# Altium PCB FRONT-UNIT-7_1.PcbDoc (part 1 of 3)
Units mm, origin at the board's own origin, x right, y up, seen from the top; angles counter-clockwise.
Board outline 280 x 128 mm, 2 copper layers (Top Layer, Top, Bottom Layer, Bottom), stack 1.671 mm thick; 140 components, 117 nets, 608 pads, 1302 vias.
Unrouted connection lines stored in the file: 26.
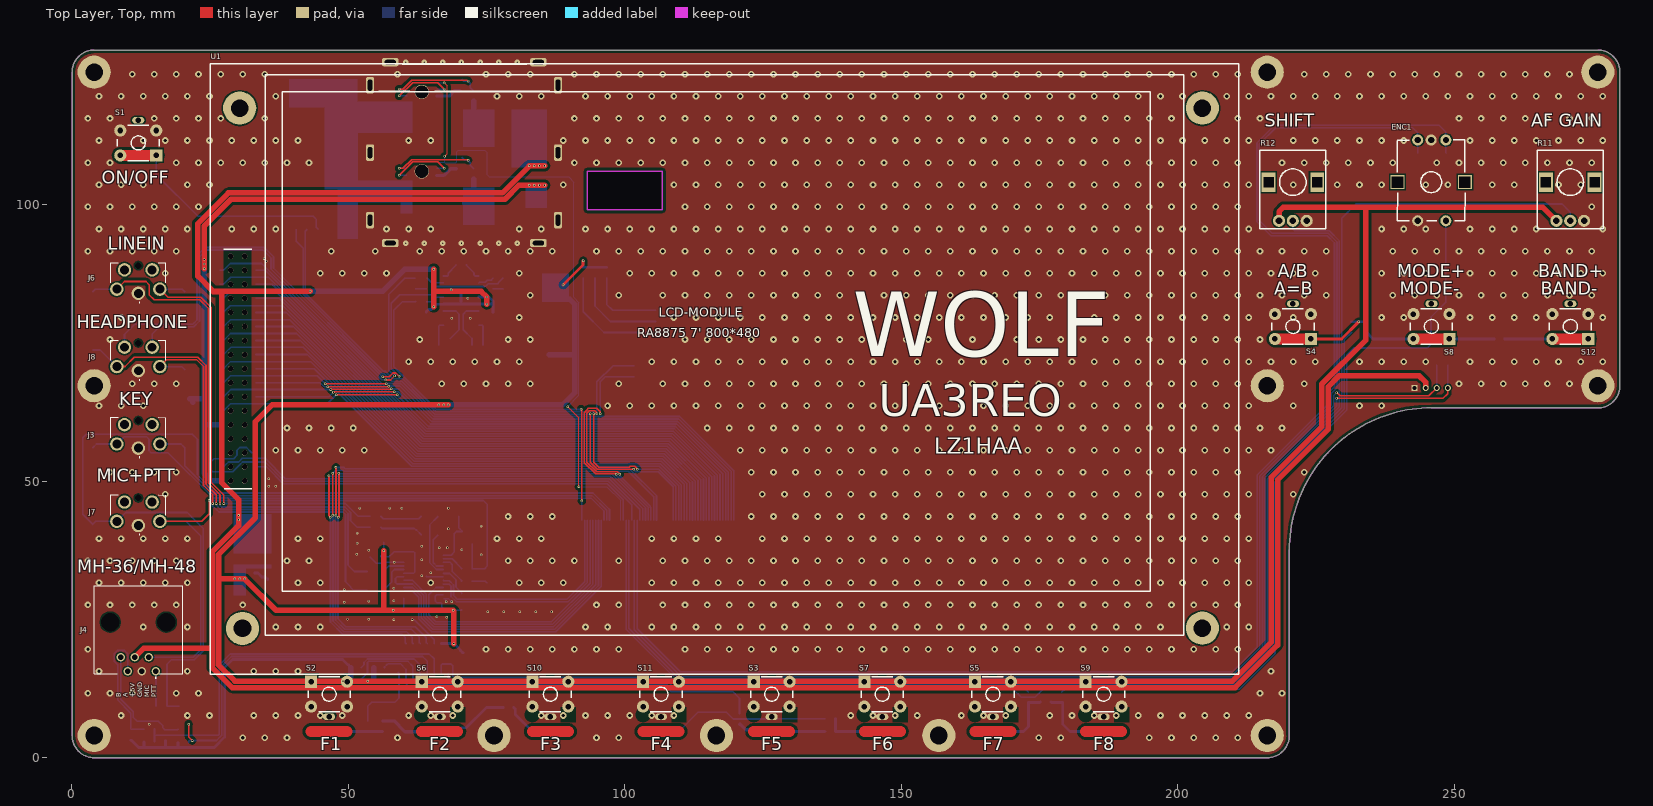
[diagram p0: Top Layer, Top view]
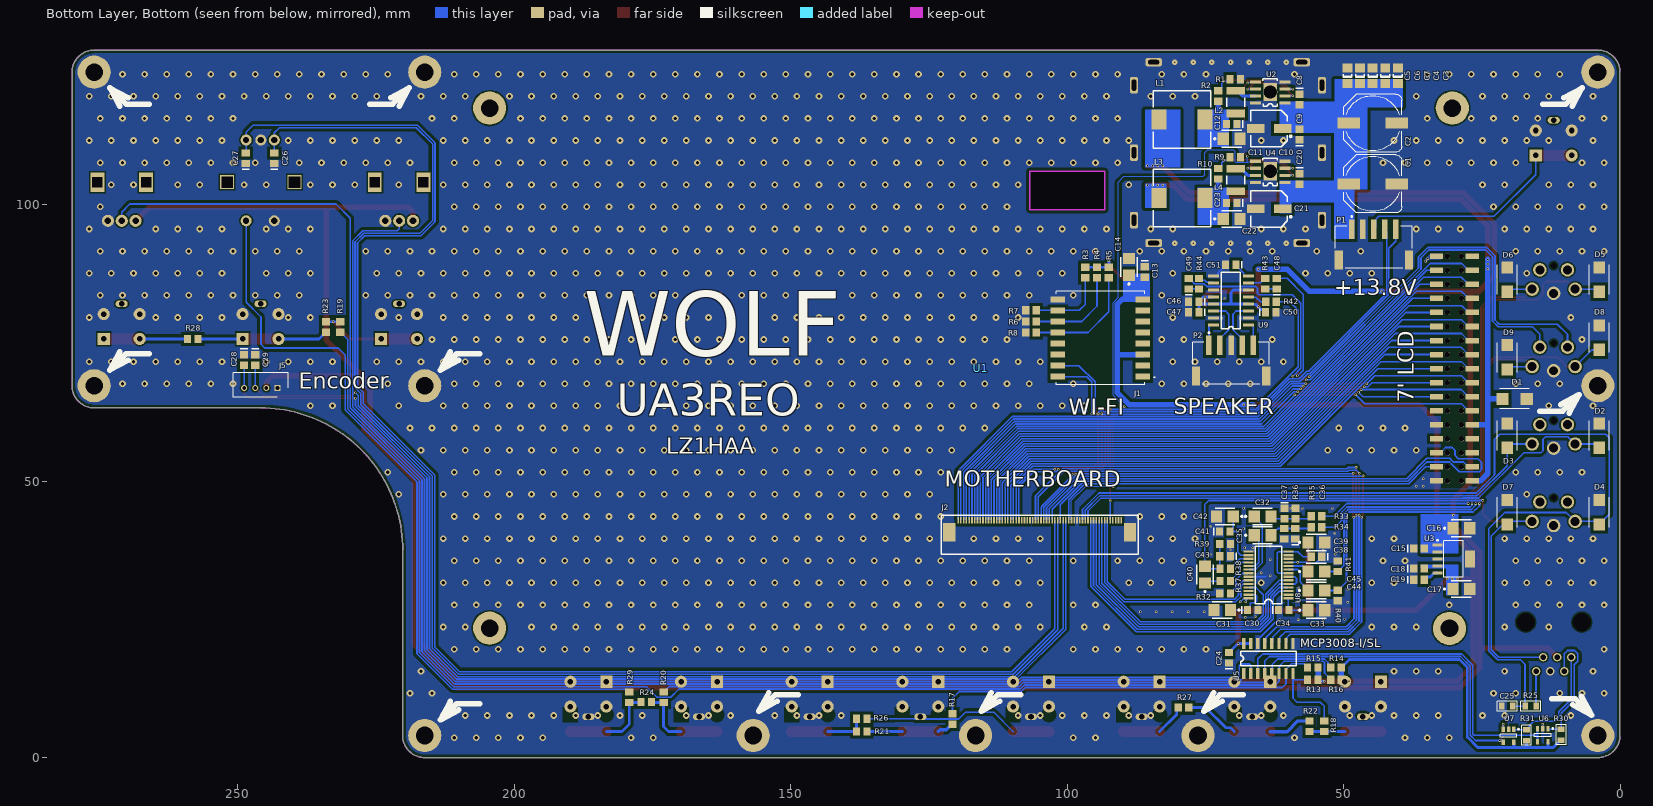
[diagram p1: Bottom Layer, Bottom view, seen from below]
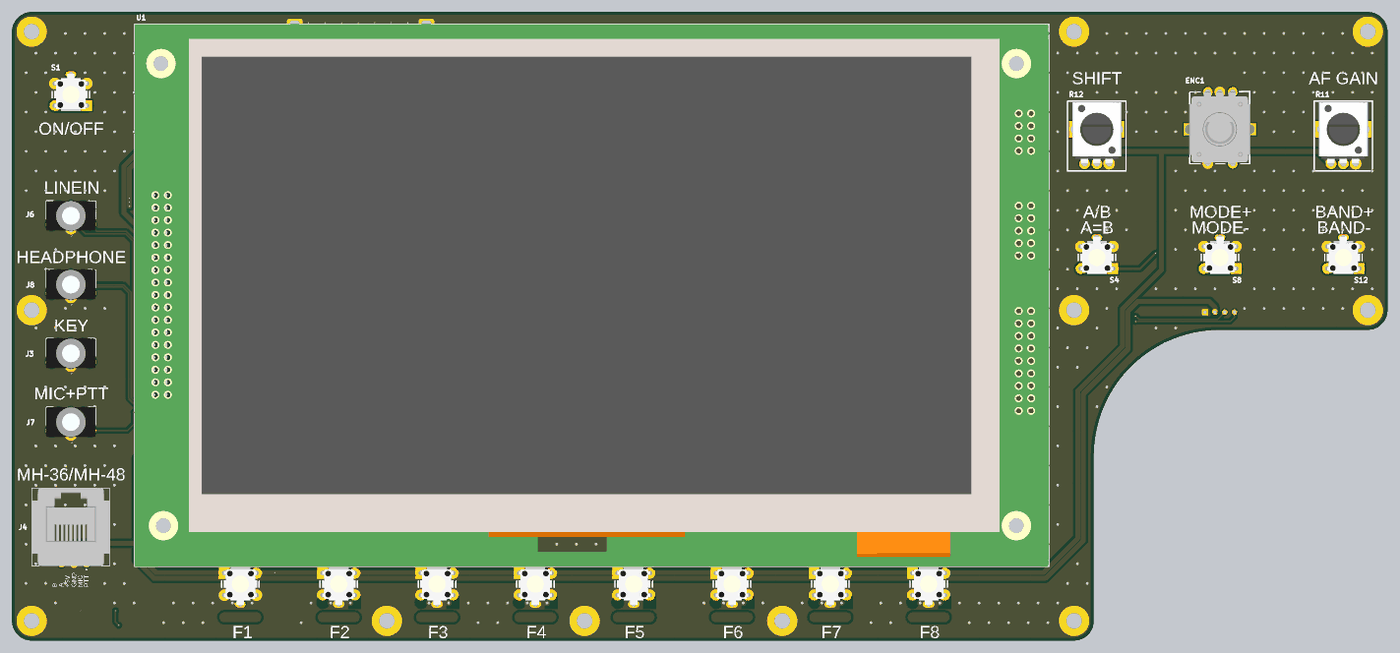
[diagram p4: 3D render of the assembled board from above, using the file's embedded part models]

## Layer stack, top to bottom
Top Solder, Top Mask: solder mask 0.0102, Solder Resist, Dk 3.5
Top Layer, Top: signal copper 0.0356
Dielectric 1: dielectric 1.6, FR-4, Dk 4.8
Bottom Layer, Bottom: signal copper 0.0356
Bottom Solder, Bot Mask: solder mask 0.0102, Solder Resist, Dk 3.5

## Board outline
0.006,4.013 ccw(c4.013,4.013) 4.013,0.006 216.193,0.006 ccw(c216.193,4.013) 220.2,4.013 220.2,37.575 cw(c245.9,37.575) 245.9,63.275 275.996,63.275 275.996,63.278 ccw(c275.996,67.285) 280.003,67.285 280.003,124.003 ccw(c275.996,124.003) 275.996,128.01 4.013,128.01 ccw(c4.013,124.003) 0.006,124.003
cut-out: 93.21,106.05 106.725,106.05 106.725,99.125 93.21,99.125

## Design rules (kind name [scope] priority, off if disabled: settings)
BoardOutlineClearance [All] p1: gap=0.3 ignorepadtopadclearanceinfootprint=FALSE
Clearance Clearance_NPTH [All vs InPadClass('NPTH')] p1: gap=0.4 ignorepadtopadclearanceinfootprint=FALSE except(0: Arc-Hole Track-Hole SMDPad-Hole THPad-Hole Via-Hole Fill-Hole Poly-Hole Region-Hole Text-Hole)
Clearance Clearance_MultiLayerPad [OnLayer('Multi-Layer') and IsPad] p2: gap=0.25 ignorepadtopadclearanceinfootprint=FALSE except(0: Arc-Hole Track-Hole SMDPad-Hole THPad-Hole Via-Hole Fill-Hole Poly-Hole Region-Hole Text-Hole)
Clearance Clearance_Polygon [InPolygon] p3: gap=0.5 ignorepadtopadclearanceinfootprint=FALSE
Clearance [All] p4: gap=0.15 ignorepadtopadclearanceinfootprint=FALSE except(0: Arc-Hole Track-Hole SMDPad-Hole THPad-Hole Via-Hole Fill-Hole Poly-Hole Region-Hole Text-Hole)
ComponentClearance [All] p1: gap=0 collisioncheckmode=3 verticalgap=0 showdistances=FALSE
Height [All] p1: minheight=0 maxheight=60 prefheight=12.7
HoleSize [All] p1: absolutevalues=TRUE maxlimit=5 minlimit=0.025 maxpercent=80.000 minpercent=20.000
HoleToHoleClearance [All] p1: gap=0.2 allowstackedmicrovias=TRUE
MinimumSolderMaskSliver [All] p1: minsoldermaskwidth=0.04
PlaneClearance [All] p1: clearance=0.5
PlaneConnect [All] p1: planeconnectstyle=Relief reliefexpansion=0.5 reliefentries=4 reliefconductorwidth=0.3 reliefairgap=0.2
PolygonConnect [All] p1: connectstyle=Direct reliefconductorwidth=0.6 reliefentries=4 polygonreliefangle="90 Angle" airgapwidth=0.3
RoutingVias [All] p1: holewidth=0.3 width=0.7 viastyle="Through Hole" minholewidth=0.25 minwidth=0.45 maxholewidth=3 maxwidth=5
SilkToSilkClearance [All] p1: silktosilkclearance=0
SilkToSolderMaskClearance [IsPad] p1: minsilkscreentomaskgap=0.05 clearancetoexposedcopper=TRUE
SolderMaskExpansion [All] p1: expansion=0.075 istentingtop=FALSE
Width [All] p1: maxlimit=10 minlimit=0.15 preferedwidth=0.3
21 further rules are at their usual default settings.

## Classes and differential pairs
net class PowerPads: 5V +3V3 +5 +13.8 GND NetL2_1
component class "AUDIO CODEC": C30 C31 C32 C33 C34 C35 C36 C37 C38 C39 C40 C41 C42 C43 C44 C45 C46 C47 C48 C49 C50 C51 D5 D6 D7 D8 D9 J6 J7 J8 MIС_IN1 P2 R32 R33 R34 R35 R36 R37 R38 R39 R40 R41 R42 R43 R44 U8 U9
component class FRONT-UNIT-7: C1 C2 C3 C4 C5 C6 C7 C8 C9 C10 C11 C12 C13 C14 C15 C16 C17 C18 C19 C20 C21 C22 C23 C24 C25 C26 C27 C28 C29 D1 D2 D3 D4 ENC1 J1 J2 J3 J5 L1 L2 L3 L4 P1 R1 R2 R3 R4 R5 R6 R7 R8 R9 R10 R11 R12 R13 R14 R15 R16 R17 R18 R19 R20 R21 R22 R23 R24 R25 R26 R27 R28 R29 R30 R31 S1 S2 S3 S4 S5 S6 S7 S8 S9 S10 S11 S12 U1 U2 U3 U4 U5 U6 U7

## Components (designator, comment, footprint, x,y, rotation, side; value= is the part's Value field where it differs from the comment)
C1 "470uF 25V" SMD-G-10X10.2 44.729,103.81 r0 bottom value=470µF
C2 "470uF 25V" SMD-G-10X10.2 44.729,114.783 r0 bottom value=470µF
C3 "1uF" CAP_1206 40.183,123.368 r90 bottom
C4 "100n" CAP_1206 42.462,123.368 r90 bottom
C5 "1n" CAP_1206 49.301,123.368 r90 bottom
C6 "470p" CAP_1206 47.022,123.368 r90 bottom
C7 "120p" CAP_1206 44.742,123.368 r90 bottom
C8 "100n" CAP_0805 57.988,119.253 r270 bottom
C9 "100n" CAP_0805 57.988,112.522 r90 bottom
C10 "4.7uF 16V" CAPAE_6.6x6.6h5.4 63.373,113.843 r0 bottom
C11 "22uF 10V" CAPAE_4.3x4.3h5.4 70.663,111.963 r180 bottom
C12 "100n" CAP_0805 70.053,114.63 r0 bottom
C13 "100n" CAP_0805 85.979,88.062 r270 bottom
C14 "10uF 10V" CAPAE_4.3x4.3h5.4 88.798,88.367 r90 bottom
C15 "100n" CAP_0805 36.551,37.846 r180 bottom
C16 "10uF 10V" CAPAE_4.3x4.3h5.4 29.083,41.504 r180 bottom
C17 "10uF 10V" CAPAE_4.3x4.3h5.4 29.083,30.505 r180 bottom
C18 "100n" CAP_0805 36.551,34.214 r180 bottom
C19 "100n" CAP_0805 36.551,32.207 r180 bottom
C20 "100n" CAP_0805 57.988,104.877 r270 bottom
C21 "4.7uF 16V" CAPAE_6.6X6.6H5.4 63.373,99.289 r0 bottom
C22 "22uF 10V" CAPAE_4.3X4.3H5.4 70.663,97.464 r180 bottom
C23 "100n" CAP_0805 70.053,100.33 r0 bottom
C24 "100n" CAP_0805 70.739,17.856 r90 bottom
C25 "0.1" CH0805C 20.422,9.322 r180 bottom
C26 "100n" CAP_0805 243.408,108.229 r90 bottom
C27 "100n" CAP_0805 248.575,108.235 r90 bottom
C28 "10n" CAP_0805 248.895,72.136 r270 bottom
C29 "10n" CAP_0805 246.863,72.136 r270 bottom
C30 "100n" CAP_0805 66.633,26.734 r180 bottom
C31 "10uF 10V" CAPAE_4.3X4.3H5.4 71.558,26.709 r0 bottom
C32 "1uF 10V" CAPAE_4.3X4.3H5.4 65.058,43.659 r180 bottom
C33 "10uF 10V" CAPAE_4.3X4.3H5.4 55.308,26.684 r180 bottom
C34 "100n" CAP_0805 61.033,26.709 r180 bottom
C35 "1uF 10V" CAPAE_4.3X4.3H5.4 65.058,40.234 r180 bottom
C36 "220p" CAP_0805 58.733,40.309 r90 bottom
C37 "220p" CAP_0805 60.683,44.359 r270 bottom
C38 "100n" CAP_0805 54.708,36.334 r0 bottom
C39 "10uF 10V" CAPAE_4.3X4.3H5.4 55.308,38.959 r180 bottom
C40 "1uF 10V" CAPAE_4.3X4.3H5.4 75.083,32.734 r90 bottom
C41 "100n" CAP_0805 71.683,40.909 r180 bottom
C42 "10uF 10V" CAPAE_4.3X4.3H5.4 71.058,43.659 r0 bottom
C43 "220p" CAP_0805 71.233,36.429 r0 bottom
C44 "220uF 10V" CAPAE_4.3X4.3H5.4 55.308,30.234 r180 bottom
C45 "220uF 10V" CAPAE_4.3X4.3H5.4 55.308,33.684 r180 bottom
C46 "1uF" CAP_0805 76.911,82.499 r0 bottom
C47 "100n" CAP_0805 76.911,80.594 r0 bottom
C48 "1uF" CAP_0805 62.103,85.55 r90 bottom
C49 "1uF" CAP_0805 78.029,85.55 r90 bottom
C50 "1uF" CAP_0805 63.348,80.594 r180 bottom
C51 "1uF" CAP_0805 70.206,89.154 r0 bottom
D1 "SMAJ5.0A-TR" SMBJ36CATR 19.075,64.897 r180 bottom
D2 "SMAJ5.0A-TR" SMBJ36CATR 3.75,58.275 r90 bottom
D3 "SMAJ5.0A-TR" SMBJ36CATR 20.4,58.275 r90 bottom
D4 "SMAJ5.0A-TR" SMBJ36CATR 3.75,44.4 r90 bottom
D5 "SMAJ5.0A-TR" SMBJ36CATR 3.75,86.475 r90 bottom
D6 "SMAJ5.0A-TR" SMBJ36CATR 20.4,86.475 r90 bottom
D7 "SMAJ5.0A-TR" SMBJ36CATR 20.4,44.4 r90 bottom
D8 "SMAJ5.0A-TR" SMBJ36CATR 3.759,75.997 r90 bottom
D9 "SMAJ5.0A-TR" SMBJ36CATR 20.4,72.425 r90 bottom
ENC1 "PEC12" PEC12 245.86,104.11 r0 top locked
J1 "ESP8266_ESP-07" ESP8266ESP07 94.005,75.921 r0 bottom locked
J2 "AFC07-S60FCA-00" AFC07-S60FCA-00 104.975,41.875 r180 bottom locked
J3 "PJ-3583-B" PJ3583B 12,56 r180 top locked
J4 "42878-6216" 428786216 15.164,15.642 r0 top locked
J5 "B4B-PH-K-S_LF__SN_" SHDR4W50P0X200_1X4_990X450X600P 242.863,66.878 r180 bottom locked
J6 "PJ-3583-B" PJ3583B 12,84 r180 top locked
J7 "PJ-3583-B" PJ3583B 12,42 r180 top locked
J8 "PJ-3583-B" PJ3583B 12,70 r180 top locked
L1 "10uH" IND_FERRITE_CORE 79.248,115.443 r180 bottom
L2 "3.3uH" IND_1812 69.52,118.593 r270 bottom
L3 "10uH" IND_FERRITE_CORE 79.248,101.239 r180 bottom
L4 "3.3uH" IND_1812 69.52,104.496 r270 bottom
P1 "S5B-PH-SM4-TB(LF)(SN)" JST-S5B-PH-SM4-TB_V 44.526,92.913 r180 bottom
P2 "S5B-PH-SM4-TB(LF)(SN)" JST-S5B-PH-SM4-TB_V 70.358,71.907 r180 bottom locked
R1 "7.5k" RES_0805 69.571,122.707 r0 bottom
R2 "39k" RES_0805 72.669,119.71 r270 bottom
R3 "4.7k" RES_0805 96.749,87.782 r270 bottom
R4 "4.7k" RES_0805 94.602,87.782 r270 bottom
R5 "4.7k" RES_0805 92.456,87.782 r270 bottom
R6 "0R" RES_0805 106.528,80.924 r0 bottom
R7 "0R" RES_0805 106.528,78.918 r0 bottom
R8 "0R" RES_0805 106.528,76.911 r0 bottom
R9 "4.7k" RES_0805 69.571,108.61 r0 bottom
R10 "15k" RES_0805 72.669,105.613 r270 bottom
R11 "ptv09a-4225f-b102" PTV09 271.01,104.11 r0 top locked value="AF GAIN 1k"
R12 "ptv09a-4225f-b102" PTV09 220.835,104.11 r0 top locked value="SHIFT 1k"
R13 "4.7k" RES_0805 55.575,14.097 r180 bottom
R14 "4.7k" RES_0805 51.376,16.307 r180 bottom
R15 "4.7k" RES_0805 55.575,16.307 r180 bottom
R16 "4.7k" RES_0805 51.376,14.097 r180 bottom
R17 "1k" RES_0805 120.752,7.01 r90 bottom
R18 "1k" RES_0805 53.5,5.675 r90 bottom
R19 "1k" RES_0805 231.461,77.902 r270 bottom
R20 "1k" RES_0805 172.975,10.925 r90 bottom
R21 "2k" RES_0805 137.16,4.75 r180 bottom
R22 "2k" RES_0805 56.175,5.702 r270 bottom
R23 "2k" RES_0805 234.061,77.902 r90 bottom
R24 "2k" RES_0805 176.125,10.075 r180 bottom
R25 "100" CH0805R 16.18,9.322 r0 bottom
R26 "4.7k" RES_0805 137.16,7.061 r0 bottom
R27 "4.7k" RES_0805 78.969,9.068 r180 bottom
R28 "4.7k" RES_0805 258.191,75.743 r180 bottom
R29 "4.7k" RES_0805 179.225,10.925 r270 bottom
R30 "47k" CH0805R 10.649,4.157 r270 bottom
R31 "47k" CH0805C 16.916,4.064 r270 bottom
R32 "10k" RES_0805 71.433,29.709 r180 bottom
R33 "5.6k" RES_0805 54.883,43.659 r0 bottom
R34 "5.6k" RES_0805 54.883,41.709 r0 bottom
R35 "5.6k" RES_0805 60.708,40.509 r90 bottom
R36 "5.6k" RES_0805 58.708,44.184 r270 bottom
R37 "10k" RES_0805 71.408,31.949 r180 bottom
R38 "680" RES_0805 71.408,34.189 r180 bottom
R39 "47k" RES_0805 71.433,38.669 r0 bottom
R40 "47k" RES_0805 51.033,29.334 r90 bottom
R41 "47k" RES_0805 51.033,34.659 r270 bottom
R42 "1k" RES_0805 63.144,82.499 r180 bottom
R43 "30k" RES_0805 64.16,85.75 r270 bottom
R44 "30k" RES_0805 76.149,85.75 r270 bottom
S1 "PTS645SK50LFS" PTS645SK50LFS 11.989,111.201 r180 top locked value=PWR
S2 "PTS645SK50LFS" PTS645SK50LFS 46.5,11.5 r0 top locked
S3 "PTS645SK50LFS" PTS645SK50LFS 126.557,11.5 r0 top locked
S4 "PTS645SK50LFS" PTS645SK50LFS 220.85,78.002 r180 top locked
S5 "PTS645SK50LFS" PTS645SK50LFS 166.586,11.5 r0 top locked
S6 "PTS645SK50LFS" PTS645SK50LFS 66.514,11.5 r0 top locked
S7 "PTS645SK50LFS" PTS645SK50LFS 146.571,11.5 r0 top locked
S8 "PTS645SK50LFS" PTS645SK50LFS 245.9,78.002 r180 top locked
S9 "PTS645SK50LFS" PTS645SK50LFS 186.6,11.5 r0 top locked
S10 "PTS645SK50LFS" PTS645SK50LFS 86.529,11.5 r0 top locked
S11 "PTS645SK50LFS" PTS645SK50LFS 106.543,11.5 r0 top locked
S12 "PTS645SK50LFS" PTS645SK50LFS 271.025,78.002 r180 top locked
U1 "LCD-RA8875" LCD-RA8875 25,125.5 r0 top locked
U2 "ST1S10" ST1S10 63.271,120.32 r0 bottom
U3 "TPS79633DCQR" DCQ0006A_L 30.099,35.941 r180 bottom
U4 "ST1S10" ST1S10 63.271,105.964 r0 bottom
U5 "MCP3008-I/SL" MCP3008-I/SL 63.602,17.958 r90 bottom
U6 "MCP6001UT" SOT23-5 13.97,4.064 r270 bottom
U7 "MCP6001UT" SOT23-5 20.142,3.962 r270 bottom
U8 "WM8731" WM8731 63.583,33.059 r0 bottom
U9 "PAM8406" PAM8403 70.387,82.701 r0 bottom

## Footprints (in the part's own frame and the unit in brackets; to place one, negate y for a bottom-side part, rotate by r counter-clockwise, add the part's x,y. Pads: shape width x height; smd on the part's side, far side on the other; paste and mask are expansions set on the pad)
428786216 [mm]
  round 1.509 hole 0.97: 1(0,0) 2(-1.27,2.54) 3(-2.54,0) 4(-3.81,2.54) 5(-5.08,0) 6(-6.35,2.54)
  round 1.665 hole 3.33 unplated: 7(-8.255,8.89) 8(1.905,8.89)
  silkscreen extent -11.17,-1.3 4.82,15.44, body extent -11.18,-0.44 4.83,15.44, height 12.71
AFC07-S60FCA-00 [mm]
  rect 0.3x1.2 smd: 1(-14.75,1.088) 2(-14.25,1.088) 3(-13.75,1.088) 4(-13.25,1.088) 5(-12.75,1.088) 6(-12.25,1.088) 7(-11.75,1.088) 8(-11.25,1.088) 9(-10.75,1.088) 10(-10.25,1.088) 11(-9.75,1.088) 12(-9.25,1.088) 13(-8.75,1.088) 14(-8.25,1.088) 15(-7.75,1.088) 16(-7.25,1.088) 17(-6.75,1.088) 18(-6.25,1.088) 19(-5.75,1.088) 20(-5.25,1.088) 21(-4.75,1.088) 22(-4.25,1.088) 23(-3.75,1.088) 24(-3.25,1.088) 25(-2.75,1.088) 26(-2.25,1.088) 27(-1.75,1.088) 28(-1.25,1.088) 29(-0.75,1.088) 30(-0.25,1.088) 31(0.25,1.088) 32(0.75,1.088) 33(1.25,1.088) 34(1.75,1.088) 35(2.25,1.088) 36(2.75,1.088) 37(3.25,1.088) 38(3.75,1.088) 39(4.25,1.088) 40(4.75,1.088) 41(5.25,1.088) 42(5.75,1.088) 43(6.25,1.088) 44(6.75,1.088) 45(7.25,1.088) 46(7.75,1.088) 47(8.25,1.088) 48(8.75,1.088) 49(9.25,1.088) 50(9.75,1.088) 51(10.25,1.088) 52(10.75,1.088) 53(11.25,1.088) 54(11.75,1.088) 55(12.25,1.088) 56(12.75,1.088) 57(13.25,1.088) 58(13.75,1.088) 59(14.25,1.088) 60(14.75,1.088)
  rect 2.2x3.3 smd: 61(-16.35,-1.087) 62(16.35,-1.087)
  silkscreen extent -17.8,-5.05 17.8,1.95, body extent -17.14,-4.83 17.14,0.89, height 3
CAP_0805 [mm]
  rect 1.3x1.5 smd: 1(-0.75,0) 2(1.15,0)
  silkscreen extent -1.8,-0.65 -1.8,0.65
CAP_1206 [mm]
  rect 1.6x1.8 smd: 1(-1.4,0) 2(1.4,0)
  silkscreen extent -0.3,-0.8 0.3,0.8
CAPAE_4.3x4.3h5.4 [mm]
  rect 2x2.2 smd: 1(-1.1,0) 2(1.9,0)
  silkscreen extent -2.9,-1.5 2.2,1.5
CAPAE_4.3X4.3H5.4 [mm]
  rect 2x2.2 smd: 1(-1.1,0) 2(1.9,0)
  silkscreen extent -2.9,-1.5 2.2,1.5
CAPAE_6.6x6.6h5.4 [mm]
  rect 3.15x1.6 smd: 1(-2.362,0) 2(2.538,0)
  silkscreen extent -4.11,-3.3 3.39,3.3
CAPAE_6.6X6.6H5.4 [mm]
  rect 3.15x1.6 smd: 1(-2.362,0) 2(2.538,0)
  silkscreen extent -4.11,-3.3 3.39,3.3
CH0805C [mm] "Chip Capacitor, 2-Leads, Body 2,00x1,20mm, IPC Medium Density"
  rect 1x1.25 smd: 1(-1,0) 2(1,0)
  silkscreen extent -1.8,-0.9 1.8,0.9, body extent -1,-0.62 1,0.63, height 0.78
CH0805R [mm]
  rect 1x1.25 smd: 1(-1,0) 2(1,0)
  silkscreen extent -1.8,-0.9 1.8,0.9, body extent -1,-0.6 1,0.6, height 0.44
DCQ0006A_L [mm] "SOT223, 6-Leads, Body 6.55x3.55mm, Pitch 1.27mm, IPC High Density"
  rrect17% 1.8x0.6 smd: 1(-2.925,2.54) 2(-2.925,1.27) 3(-2.925,0) 4(-2.925,-1.27) 5(-2.925,-2.54)
  rrect6% 1.8x3.15 smd: 6(2.925,0)
  silkscreen extent -3.05,-3.3 1.75,3.51, body extent -3.48,-3.25 3.48,3.25, height 1.64
ESP8266ESP07 [mm]
  rect 2.6x1.1 smd: 1(-7.7,7) 2(-7.7,5) 3(-7.7,3) 4(-7.7,1) 5(-7.7,-1) 6(-7.7,-3) 7(-7.7,-5) 8(-7.7,-7) 9(7.7,-7) 10(7.7,-5) 11(7.7,-3) 12(7.7,-1) 13(7.7,1) 14(7.7,3) 15(7.7,5) 16(7.7,7)
  silkscreen extent -9.9,-8.5 8,8.5, body extent -8,-8 8,9, height 2.21
IND_1812 [mm]
  rect 1.4x3.4 smd: 1(-2.05,0) 2(2.05,0)
  silkscreen extent -0.8,-1.6 0.8,1.6
IND_FERRITE_CORE [mm]
  rect 2.7x3.6 smd: 1(-4.15,0) 2(4.15,0)
  silkscreen extent -5.2,-5.2 5.2,5.2
JST-S5B-PH-SM4-TB_V [mm] "SMD, 7-Leads, Body 13.9x7.6mm, Pitch 2mm"
  rect 1x3.5 smd: 1(-4,2.675) 2(-2,2.675) 3(0,2.675) 4(2,2.675) 5(4,2.675)
  rect 1.5x3.4 smd: MP1(-6.35,-2.875) MP2(6.35,-2.875)
  silkscreen extent -6.95,-4.38 6.95,5.1, body extent -6.95,-4.38 6.95,4.22, height 5.6
LCD-RA8875 [mm]
  round 6 hole 3.2: 0(5.33,-8) 0(5.84,-102.1) 0(179.46,-102.07) 0(179.46,-8)
  rect 2.4x1 smd far side: 1(1.713,-34.798) 2(8.213,-34.798) 3(1.713,-37.338) 4(8.213,-37.338) 5(1.713,-39.878) 6(8.213,-39.878) 7(1.713,-42.418) 8(8.213,-42.418) 9(1.713,-44.958) 10(8.213,-44.958) 11(1.713,-47.498) 12(8.213,-47.498) 13(1.713,-50.038) 14(8.213,-50.038) 15(1.713,-52.578) 16(8.213,-52.578) 17(1.713,-55.118) 18(8.213,-55.118) 19(1.713,-57.658) 20(8.213,-57.658) 21(1.713,-60.198) 22(8.213,-60.198) 23(1.713,-62.738) 24(8.213,-62.738) 25(1.713,-65.278) 26(8.213,-65.278) 27(1.713,-67.818) 28(8.213,-67.818) 29(1.713,-70.358) 30(8.213,-70.358) 31(1.713,-72.898) 32(8.213,-72.898) 33(1.713,-75.438) 34(8.213,-75.438)
  round 1 hole 1 unplated: ""(3.683,-75.438) ""(3.683,-72.898) ""(3.683,-70.358) ""(3.683,-67.818) ""(3.683,-65.278) ""(3.683,-62.738) ""(3.683,-60.198) ""(3.683,-57.658) ""(3.683,-55.118) ""(3.683,-52.578) ""(3.683,-50.038) ""(3.683,-47.498) ""(3.683,-44.958) ""(3.683,-42.418) ""(3.683,-39.878) ""(3.683,-37.338) ""(3.683,-34.798) ""(6.223,-75.438) ""(6.223,-72.898) ""(6.223,-70.358) ""(6.223,-67.818) ""(6.223,-65.278) ""(6.223,-62.738) ""(6.223,-60.198) ""(6.223,-57.658) ""(6.223,-55.118) ""(6.223,-52.578) ""(6.223,-50.038) ""(6.223,-47.498) ""(6.223,-44.958) ""(6.223,-42.418) ""(6.223,-39.878) ""(6.223,-37.338) ""(6.223,-34.798)
  Top Layer, Top pour cut-out: 2.45,-33.8 7.45,-33.8 7.45,-76.825 2.45,-76.825
  Bottom Layer, Bottom pour cut-out: 2.45,-33.8 7.45,-33.8 7.45,-76.825 2.45,-76.825
  silkscreen extent 0,-110.36 186.06,0, body extent 0,-110.36 186.06,0, height 11.6
MCP3008-I/SL [mm]
  rect 2x0.6 smd: 1(-2.7,4.445) 2(-2.7,3.175) 3(-2.7,1.905) 4(-2.7,0.635) 5(-2.7,-0.635) 6(-2.7,-1.905) 7(-2.7,-3.175) 8(-2.7,-4.445) 9(2.7,-4.445) 10(2.7,-3.175) 11(2.7,-1.905) 12(2.7,-0.635) 13(2.7,0.635) 14(2.7,1.905) 15(2.7,3.175) 16(2.7,4.445)
  silkscreen extent -1.3,-5 1.3,5
PAM8403 [mm]
  rect 2x0.6 smd: 1(-3.175,4.445) 2(-3.175,3.175) 3(-3.175,1.905) 4(-3.175,0.635) 5(-3.175,-0.635) 6(-3.175,-1.905) 7(-3.175,-3.175) 8(-3.175,-4.445) 9(3.175,-4.445) 10(3.175,-3.175) 11(3.175,-1.905) 12(3.175,-0.635) 13(3.175,0.635) 14(3.175,1.905) 15(3.175,3.175) 16(3.175,4.445)
  silkscreen extent -1.7,-5.15 1.7,5.15
PEC12 [mm]
  round 2 hole 1.1: 1(-2.44,-6.985) 2(2.64,-6.985) 3(2.64,7.62) 4(0,7.618) 5(-2.44,7.62)
  rect 2.5x2.5 hole 2 square: 6(-6.1,0) 7(6.1,0)
  silkscreen extent -6.12,-7 6.12,7.7, body extent -7,-7.15 7,7.6, height 20
PJ3583B [mm]
  round 2.43 hole 1.62: 2(0,0) 3(-3.9,-0.75) 4(-2.5,-4.25) 5(2.5,-4.25) 6(3.9,-0.75)
  round 0.6 hole 1.2 unplated: MH1(0,-5)
  silkscreen extent -5,-5.55 5,1.7, body extent -5,-5.54 5,0.56, height 15
PTS645SK50LFS [mm]
  rect 2.2x2.2 hole 1: 1(-3.25,2.25)
  round 2.2 hole 1: 2(3.25,2.25) 3(3.25,-2.25) 4(-3.25,-2.25)
  oval 2.2x1.2 hole 1: 5(0,-4.1)
  silkscreen extent -3.81,-3.17 3.81,3.18, body extent -3.85,-4.25 3.85,3, height 7.3
PTV09 [mm]
  round 2.2 hole 1.2: 1(-2.5,-7) 2(0,-7) 3(2.5,-7)
  rect 2.5x3.5 hole 1.8 square: 4(-4.4,0) 5(4.4,0)
  silkscreen extent -5.96,-8.46 5.94,5.74, body extent -5.66,-7.11 5.64,5.49, height 31.54
RES_0805 [mm]
  rect 1.3x1.5 smd: 1(-0.95,0) 2(0.95,0)
SHDR4W50P0X200_1X4_990X450X600P [mm]
  rect 1.1x1.1 hole 0.7: 1(0,0)
  round 1.1 hole 0.7: 2(-2,0) 3(-4,0) 4(-6,0)
  silkscreen extent -7.95,-1.7 1.95,2.8, body extent -7.95,-2.25 1.95,2.25, height 6
SMBJ36CATR [mm]
  rect 2.2x2.15 smd: 1(-2.2,0) 2(2.2,0)
  silkscreen extent -2.68,-1.81 2.68,1.81, body extent -3.09,-1.81 3.09,1.81, height 2.75
SMD-G-10X10.2 [mm] "10X7.7, 8.7, 10, 10.5, 12.5"
  rect 4.1x2 smd paste-0.05 mask+0.05: 1(4.35,0) 2(-4.35,0)
  silkscreen extent -5.25,-5.25 5.25,5.25, body extent -5.85,-5.15 5.85,5.15
SOT23-5 [mm] "SOT23, 5-Leads, Body 2,90x2,80mm, Pitch 0,95mm, IPC Medium Density"
  rect 1x0.6 smd: 1(-1.2,0.95) 2(-1.2,0) 3(-1.2,-0.95) 4(1.2,-0.95) 5(1.2,0.95)
  round 0.5 on Mech2: ""(-1.1,1.1)
  silkscreen extent -1.32,-1.5 0.25,1.92, body extent -1.5,-1.5 1.5,1.5, height 1.3
ST1S10 [mm]
  rect 2x0.6 smd: 1(-2.7,1.905) 2(-2.7,0.635) 3(-2.7,-0.635) 4(-2.7,-1.905) 5(2.7,-1.905) 6(2.7,-0.635) 7(2.7,0.635) 8(2.7,1.905)
  rect 2.41x3.3 smd: 9(0,-0.1)
  silkscreen extent -1.32,-2.5 1.32,2.5
WM8731 [mm]
  rect 1.8x0.4 smd: 1(-3.6,4.225) 2(-3.6,3.575) 3(-3.6,2.925) 4(-3.6,2.275) 5(-3.6,1.625) 6(-3.6,0.975) 7(-3.6,0.325) 8(-3.6,-0.325) 9(-3.6,-0.975) 10(-3.6,-1.625) 11(-3.6,-2.275) 12(-3.6,-2.925) 13(-3.6,-3.575) 14(-3.6,-4.225) 15(3.6,-4.225) 16(3.6,-3.575) 17(3.6,-2.925) 18(3.6,-2.275) 19(3.6,-1.625) 20(3.6,-0.975) 21(3.6,-0.325) 22(3.6,0.325) 23(3.6,0.975) 24(3.6,1.625) 25(3.6,2.275) 26(3.6,2.925) 27(3.6,3.575) 28(3.6,4.225)
  silkscreen extent -2.4,-5.2 2.4,5.2

## Part data
C1 C2: library part "SMD-G 470uF 25V", "CAP ALUM 470UF 20% 25V SMD", Lifetime @ Temp=2000Hrs@105℃, Manufacturer=KEMET, Manufacturer PartNumber=EDH477M025A9PAA, Package / Case="G, 0.394\" Dia (10.00mm)", Temp.Characteristic="–55 °C to +105 °C", Tolerance="±20 %", Voltage=25V, Assembly type="Manual Part", ComponentLink2URL=http://www.mouser.com/ds/2/315/ABA0000C1181-947564.pdf, Dealer Digi-Key=https://www.digikey.com/product-detail/en/kemet/EDH477M025A9PAA/EDH477M025A9PAA-ND/6597660, Dealer Аlternative=https://detail.1688.com/offer/541866342432.html, Detailed Description="470µF 25V Aluminum Electrolytic Capacitors Radial, Can - SMD  2000 Hrs @ 105°C", HelpURL=https://api.kemet.com/component-edge/download/datasheet/EDH477M025A9PAA.pdf, Note="Aluminum Electrolytic Capacitors", PartNumber Digi-Key=EDH477M025A9PAA, Pricing Digi-Key=0.21, Pricing Аlternative=0.05, Publisher="Catcatcat Electronics", website developer=http://catcatcat.d-lan.dp.ua/
C3 C4 C5 C6 C7: library part CAP_1206, "CAP_1206"
C8 C9 C12 C13 C15 C18 C19 C20 C23 C24 C26 C27 C28 C29 C30 C34 C36 C37 C38 C41 C43 C46 C47 C48 C49 C50 C51: library part CAP_0805, "CAP_0805"
C10 C21: library part CAPAE_6.6x6.6h5.4, "CAPAE_6.6x6.6h5.4"
C11 C14 C16 C17 C22 C31 C32 C33 C35 C39 C40 C42 C44 C45: library part CAPAE_4.3x4.3h5.4, "CAPAE_4.3x4.3h5.4"
C25: library part Capacitor
D1 D4: library part SMLVT3V3, "Diode", LCSC Part #=test, Manufacturer_Name=STMicroelectronics, Mouser Part Number=511-SMLVT3V3, RS Part Number=5444821P, Allied Price/Stock=http://www.alliedelec.com/stmicroelectronics-smlvt3v3/70013736/, Allied_Number=70013736, Datasheet Link=http://www.st.com/web/en/resource/technical/document/datasheet/CD00000923.pdf, Height=2.65mm, Manufacturer_Part_Number=SMLVT3V3, Mouser Price/Stock=https://www.mouser.com/Search/Refine.aspx?Keyword=511-SMLVT3V3, RS Price/Stock=http://uk.rs-online.com/web/p/products/5444821P
D2 D3 D5 D6 D7 D8 D9: library part SMLVT3V3, "Diode", Manufacturer_Name=STMicroelectronics, Mouser Part Number=511-SMLVT3V3, RS Part Number=5444821P, Allied Price/Stock=http://www.alliedelec.com/stmicroelectronics-smlvt3v3/70013736/, Allied_Number=70013736, Datasheet Link=http://www.st.com/web/en/resource/technical/document/datasheet/CD00000923.pdf, Height=2.65mm, Manufacturer_Part_Number=SMLVT3V3, Mouser Price/Stock=https://www.mouser.com/Search/Refine.aspx?Keyword=511-SMLVT3V3, RS Price/Stock=http://uk.rs-online.com/web/p/products/5444821P
J1: "Connector", Manufacturer_Name=Ai-Thinker, Manufacturer_Part_Number="ESP8266 ESP-07", Datasheet Link=http://datasheet.octopart.com/ESP-07S-RF-Solutions-datasheet-104506015.pdf, Height=3mm
J3 J6 J7 J8: "Connector", Manufacturer_Name="JJ Electronics", Datasheet Link=https://datasheet.lcsc.com/szlcsc/2002271836_XKB-Enterprise-PJ-3583-B_C397337.pdf, Height=15mm, Manufacturer_Part_Number=PJ-3583-B
J4: "Connector", Manufacturer_Name=Molex, Mouser Part Number=538-42878-6216, Datasheet Link=https://www.molex.com/pdm_docs/sd/428786216_sd.pdf, Height=12.7mm, Manufacturer_Part_Number=42878-6216, Mouser Price/Stock=https://www.mouser.co.uk/ProductDetail/Molex/42878-6216?qs=yYVs2tXBqMPaSjdPYoO9rg%3D%3D
J5: "Connector", Arrow Part Number=B4B-PH-K-S(LF)(SN), Manufacturer_Name="JST (JAPAN SOLDERLESS TERMINALS)", Arrow Price/Stock=https://www.arrow.com/en/products/b4b-ph-k-s-lf-sn/jst-manufacturing, Datasheet Link=https://datasheet.lcsc.com/szlcsc/JST-Sales-America-B4B-PH-K-S-LF-SN_C131334.pdf, Height=6mm, Manufacturer_Part_Number=B4B-PH-K-S(LF)(SN)
L1 L3: library part IND_FERRITE_CORE, "Inductor"
L2 L4: library part IND_1812, "IND_1812"
P1 P2: library part CMP-2000-07026-1, "Male Header, Pitch 2 mm, 1 x 5 Position, Height 5.5 mm, -25 to 85 degC, RoHS, Tape and Reel", Manufacturer=JST, Package Description="Male Header, Pitch 2 mm, 1 x 5 Position, Height 5.5 mm", Package Reference=S5B-PH-SM4-TB, Datasheet URL=http://www.jst-mfg.com/product/pdf/eng/ePH.pdf, Datasheet Version=12/2012, Manufacturer URL=http://www.jst.com/home2.html, Mounting Technology=SurfaceMount, No of Positions=5, Pitch=2mm, Style/Orientation=RightAngleHeader/Plug, Termination=Crimp, Type=WiretoBoard
R1 R2 R3 R4 R5 R6 R7 R8 R9 R10 R13 R14 R15 R16 R17 R18 R19 R20 R21 R22 R23 R24 R26 R27 R28 R29 R32 R33 R34 R35 R36 R37 R38 R39 R40 R41 R42 R43 R44: library part RES_0805, "RES_0805"
R11 R12: library part PTV09, "Adjustable Resistor PTV09"
R25 R30 R31: library part Resistor
S2: LCSC Part #=test
U3: library part CMP-0395-00327-2, "Single Output High PSRR LDO, 1 A, Fixed 3.3 V Output, 2.7 to 5.5 V Input, 6-pin SOT-223 (DCQ), -40 to 125 degC, Green (RoHS & no Sb/Br)", Manufacturer="Texas Instruments", Accuracy(%)=2, ComponentLink1Description="Manufacturer URL", ComponentLink1URL=http://www.ti.com/, ComponentLink2Description=Datasheet, ComponentLink2URL=http://www.ti.com/general/docs/lit/getliterature.tsp?genericPartNumber=TPS79633&fileType=pdf, ComponentLink3Description="Package Specification", ComponentLink3URL=http://www.ti.com/litv/pdf/mpds098c, DatasheetVersion=SLVS351N, Eco-Plan="Green (RoHS & no Sb/Br)", Fixed Output Options(V)=3.3, Iout(Max)(A)=1, Iq(Typ)(mA)=0.26, Mounting Technology="Surface Mount", PackageDescription="6-Pin Plastic Small Outline, Body 3.5 x 6.5 mm, Pitch 1.27 mm", PackageReference=DCQ0006A, PackageVersion=4202109/D, PartNumber=TPS79633DCQR, SubFamily="Single Channel LDO", Vdo(Typ)(mV)=220, Vin(Max)(V)=5.5, Vin(Min)(V)=2.7, Vout Adj(Max)(V)=3.3, Vout Adj(Min)(V)=3.3
U6 U7: library part MCP6001UT_1
ENC1: FULLNAME="Выключатель замыкающий с приводом нажатием кнопки"

## Free pads (board coordinates)
  rrect50% 1.5x3 hole 0.8 slot 2 at 90 deg: 7(53.914,97.241) 7(53.914,109.449) 7(53.914,121.658) 7(87.914,97.241) 7(87.914,109.449) 7(87.914,121.658)
  rrect50% 3x1.5 hole 0.8 slot 2 at 0 deg: 7(57.564,93.091) 7(57.564,125.808) 7(84.364,93.091) 7(84.364,125.808)
  round 6 hole 3.2: ""(4.013,4.013) ""(4.013,67.285) ""(4.013,124.003) ""(76.327,4.013) ""(116.561,4.013) ""(156.794,4.013) ""(216.205,4.013) ""(216.205,67.285) ""(216.205,124.003) ""(275.996,67.285) ""(275.996,124.003)
  round 2.6 hole 2.4: ""(63.271,106.064) ""(63.271,120.42)

## Via types
v1: diameter 1.2, hole 0.6, Top Layer, Top to Bottom Layer, Bottom, tented both sides, 1155 vias
v2: diameter 0.45, hole 0.25, Top Layer, Top to Bottom Layer, Bottom, tented both sides, 133 vias
v3: diameter 1, hole 0.25, Top Layer, Top to Bottom Layer, Bottom, tented both sides, 14 vias

## Nets (pads, with @x,y where several pads share a name; then routed paths per layer and width w, separated by ;. In a path a pad name is that pad's centre, name@x,y a point inside that pad or via, vN(x,y) a via of type N, cw(c..) or ccw(c..) an arc to the next point about the centre after c; other vN are vias at no path point)
5V: C11.1 C12.2 L1.2 L2.2 R2.2 | length 4.7
  Bottom Layer, Bottom w1: C12.2@71.203,114.63 71.203,114.73 72.669,116.196 R2.2@72.669,118.76
+3V3: C13.2 C14.1 C17.1 C18.2 C24.2 C30.1 C31.1 C33.1 C34.2 C38.2 C39.1 J1.3 J1.8 R3.1 R4.1 R5.1 R11.1 R12.1 R13.2 R14.2 R15.2 R16.2 R30.2 R31.2 U3.4 U5.15 U5.16 U6.5 U7.5 U8.1 U8.8 U8.14 U8.27 | length 639.6
  Top Layer, Top w0.5: v2(88.824,85.522) 92.456,89.154 v2(92.456,89.916)
  Top Layer, Top w1: v2(56.413,37.465) 56.413,26.67 ; v2@58.133,26.67 56.413,26.67 ; v2@58.147,26.67 v2(68.936,26.67) 69.088,26.518 v2(69.088,20.658) ; v2@68.072,63.83 36.195,63.83 33.172,60.808 33.172,43.408 26.499,36.735 26.499,32.36 ; R12.1@218.335,97.11 218.335,98.799 219.129,99.593 233.985,99.593 ; R11.1@268.51,97.11 266.027,99.593 233.985,99.593 ; 26.499,32.36 26.499,16.789 29.445,13.843 209.906,13.843 216.916,20.853 216.916,50.725 226.053,59.862 226.053,67.558 233.985,75.49 233.985,99.593 ; 26.499,32.36 26.525,32.334 v2(29.439,32.334) v2(30.34,32.334) v2(31.242,32.334) 36.906,26.67 56.413,26.67
  Bottom Layer, Bottom w0.3: C33.1@56.408,26.684 v2(58.133,26.684) 59.858,26.684 C34.2@59.883,26.709 59.983,26.809 U8.1@59.983,28.834 ; C39.1@56.408,38.959 56.408,36.984 55.858,36.434 C38.2@55.858,36.334 57.346,36.334 58.296,37.284 U8.14@59.983,37.284 61.75,37.284 61.976,37.059 61.976,33.604 61.747,33.376 59.992,33.376 U8.8@59.983,33.384 ; U8.27@67.183,29.484 65.983,29.484 65.708,29.209 65.708,28.384 66.033,28.059 66.72,28.059 66.896,27.883 66.896,27.221 C30.1@67.383,26.734 67.447,26.67 v2(68.936,26.67) 70.419,26.67 C31.1@70.458,26.709
  Bottom Layer, Bottom w0.5: R30.2@10.649,3.157 10.774,3.157 12.077,1.854 13.02,1.854 ; U6.5@13.02,2.864 13.02,1.854 ; R31.2@16.916,3.064 16.916,1.854 ; U7.5@19.192,2.762 19.192,1.854 ; v2(49.022,13.818) 50.146,13.818 R16.2@50.426,14.097 ; R14.2@50.426,16.307 50.426,16.407 50.026,16.807 49.926,16.807 48.962,17.771 29.065,17.771 27.619,16.324 27.619,3.743 25.73,1.854 19.192,1.854 ; v2(53.492,13.843) 54.371,13.843 R13.2@54.625,14.097 ; U5.15@66.777,20.658 U5.16@68.047,20.658 v2(69.088,20.658) 70.239,19.507 70.239,19.407 70.639,19.006 C24.2@70.739,19.006 ; v2(92.456,89.916) R5.1@92.456,88.732 R4.1@94.602,88.732 R3.1@96.749,88.732 ; 13.02,1.854 16.916,1.854 ; 16.916,1.854 19.192,1.854
  Bottom Layer, Bottom w1: R16.2@50.426,14.097 R14.2@50.426,16.307 ; R13.2@54.625,14.097 R15.2@54.625,16.307 ; v2(66.319,63.805) v2(67.234,63.805) v2(68.072,63.805) 88.722,63.805 90.957,66.04 90.957,72.949 ; J1.3@86.305,72.921 90.929,72.921 90.957,72.949 ; J1.8@86.305,82.921 90.053,82.921 90.957,82.017 90.957,72.949
+5: C15.2 C16.1 C46.1 C47.1 C50.1 J4.4 J5.2 L1.1 U3.1 U3.2 U9.4 U9.6 U9.12 U9.13 | length 517.7
  Top Layer, Top w1: J4.4@11.354,18.182 11.384,18.182 12.963,19.761 25.349,19.761 ; v2(43.053,84.353) 27.072,84.353 27.051,84.332 ; v2(65.43,81.559) 65.43,84.353 74.016,84.353 v2(75.032,83.337) v2(75.032,82.067) ; 65.43,84.354 v2(65.43,88.367) ; v2(85.471,107.061) v2(84.557,107.061) v2(83.642,107.061) v2(82.728,107.061) 77.833,102.166 28.303,102.166 22.758,96.622 22.758,87.122 25.548,84.332 27.051,84.332 ; J5.2@244.863,66.878 244.843,66.897 244.843,67.932 243.688,69.088 229.21,69.088 227.203,67.081 227.203,59.385 218.066,50.248 218.066,20.377 210.382,12.693 28.969,12.693 25.349,16.313 25.349,19.761 ; 25.349,19.761 25.349,37.211 30.124,41.986 v2(30.124,43.028) v2(30.124,43.815) 30.124,46.685 27.051,49.759 27.051,84.332
  Bottom Layer, Bottom w0.5: C50.1@64.097,80.594 64.097,80.694 64.497,81.094 64.965,81.094 v2(65.43,81.559) 65.894,82.023 67.169,82.023 U9.4@67.212,82.066 70.387,82.066 ; U9.6@67.212,84.606 v2(68.582,84.606) 69.953,84.606 70.387,84.172 70.387,82.066 ; U9.12@73.562,83.336 75.425,83.336 76.162,82.599 C46.1@76.162,82.499 C46.1@76.162,82.466 ; C47.1@76.162,80.594 C46.1@76.162,82.466 ; 70.387,82.066 U9.13@73.562,82.066 75.761,82.066 C46.1@76.162,82.466
  Bottom Layer, Bottom w1: v2(43.053,84.353) 56.185,84.353 60.198,88.367 v2(65.43,88.367) ; L1.1@83.398,114.993 L1.1@83.398,115.443
+13.8: C1.1 C2.1 C3.1 C4.1 C5.1 C6.1 C7.1 C8.2 C9.2 C10.1 C20.2 C21.1 P1.1 U2.1 U4.1
+LCD_3V3: D1.1 L3.1 U1.25 U1.33 | length 119.8
  Top Layer, Top w1: v2(23.927,88.468) v2(23.927,89.306) v2(23.927,90.119) 23.927,96.164 28.779,101.016 78.311,101.016 80.851,103.556 v2(82.728,103.556) v2(83.642,103.556) v2(84.557,103.556) v2(85.471,103.556)
  Bottom Layer, Bottom w1: D1.1@21.275,64.897 23.901,64.897 23.927,64.872 ; v2(23.927,90.119) v2(23.927,89.306) v2(23.927,88.468) 23.927,64.872 ; U1.33@26.713,50.062 25.274,50.062 23.927,51.41 23.927,60.223 ; U1.25@26.713,60.222 23.928,60.222 23.927,60.223 ; 23.927,60.223 23.927,64.872
AD1_CS: J2.34 U5.10 | length 103.7
  Top Layer, Top w0.3: v2(46.482,51) 46.482,43.745 46.694,43.534 v2(46.694,43.493)
  Bottom Layer, Bottom w0.3: v2(46.482,51) 46.523,51 46.598,50.925 97.387,50.925 103.225,45.087 J2.34@103.225,42.962 ; v2(46.694,43.493) 46.694,43.452 46.769,43.377 46.769,24.55 48.971,22.348 59.668,22.348 60.277,21.74 60.277,20.808 U5.10@60.427,20.658
AF_AMP_IN_L: C48.2 J8.4 | length 91.7
  Top Layer, Top w0.3: v2(56.744,68.326) 57.607,68.326 v2(58.344,69.063)
  Bottom Layer, Bottom w0.3: J8.4@14.5,74.25 14.5,76.654 15.824,77.978 22.049,77.978 23.056,78.985 23.056,90.595 24.308,91.846 34.569,91.846 35.992,90.424 35.992,88.393 56.03,68.355 56.715,68.355 v2(56.744,68.326) ; v2(58.344,69.063) 57.31,70.097 57.31,83.802 60.208,86.7 C48.2@62.103,86.7
AF_AMP_IN_R: C49.2 J8.5 | length 113.2
  Top Layer, Top w0.3: v2(56.223,68.905) 57.373,68.905 58.056,69.588 58.592,69.588 v2(59.155,69.024)
  Bottom Layer, Bottom w0.3: J8.5@9.5,74.25 9.5,76.581 11.347,78.428 21.862,78.428 22.606,79.172 22.606,90.781 24.121,92.296 34.756,92.296 36.442,90.61 36.442,88.58 56.042,68.98 56.107,68.98 56.182,68.905 v2(56.223,68.905) ; v2(59.155,69.024) 57.76,70.42 57.76,82.22 59.258,83.718 65.303,83.718 65.557,83.972 65.557,84.912 65.888,85.242 74.767,85.242 75.275,85.75 77.023,85.75 77.217,85.944 77.217,85.988 77.929,86.7 C49.2@78.029,86.7
AF_AMP_MUTE: J2.56 R42.2 | length 72.1
  Top Layer, Top w0.3: v2(92.075,63.058) 92.075,63.017 92.225,62.867 v2(92.225,46.44)
  Bottom Layer, Bottom w0.3: R42.2@62.174,82.52 R42.2@62.194,82.499 59.768,82.499 58.21,80.941 58.21,70.712 65.604,63.318 65.939,62.983 91.959,62.983 92.034,63.058 v2(92.075,63.058) ; J2.56@92.225,42.962 v2(92.225,46.44)
AUDIO_I2S_CLOCK: J2.53 U8.25 | length 50.8
  Bottom Layer, Bottom w0.3: U8.25@67.183,30.784 65.833,30.784 64.533,29.484 64.533,25.86 65.81,24.582 86.739,24.582 93.725,31.568 J2.53@93.725,42.962
CLK: J2.33 U5.13 | length 105.2
  Top Layer, Top w0.3: v2(48.194,43.485) 48.194,43.526 48.285,43.617 v2(48.285,51.45)
  Bottom Layer, Bottom w0.3: v2(48.194,43.485) 48.194,43.444 48.119,43.369 48.119,25.11 49.53,23.698 62.078,23.698 64.087,21.689 64.087,20.808 U5.13@64.237,20.658 ; v2(48.285,51.45) 48.326,51.45 48.401,51.375 50.343,51.375 97.573,51.375 103.725,45.223 J2.33@103.725,42.962
CPU_PW_HOLD: J2.23 P1.5 | length 105
  Top Layer, Top w0.254: v2(93.761,62.25) 93.761,53.457 95.055,52.163 101.59,52.163 v2(101.627,52.2)
  Bottom Layer, Bottom w0.254: P1.5@40.526,95.588 40.526,93.459 41.785,92.2 41.785,83.84 56.156,69.469 56.464,69.469 57.815,68.118 59.629,68.118 61.346,66.401 65.595,62.152 93.61,62.152 93.708,62.25 v2(93.761,62.25) ; v2(101.627,52.2) 101.627,52.147 101.725,52.049 101.725,51.989 102.019,51.695 106.052,51.695 108.725,49.022 J2.23@108.725,42.962
CPU_PW_ON: J2.22 P1.4 | length 105
  Top Layer, Top w0.254: v2(94.361,62.25) 94.361,53.482 95.275,52.567 100.837,52.567 100.972,52.702 101.835,52.702 102.184,52.352 102.184,52.292 102.227,52.25 v2(102.227,52.197)
  Bottom Layer, Bottom w0.254: P1.4@42.526,95.588 42.189,95.251 42.189,84.007 56.324,69.873 56.632,69.873 57.982,68.522 59.796,68.522 63.219,65.099 65.762,62.556 92.782,62.556 92.786,62.56 93.282,62.56 93.473,62.752 94.118,62.752 94.323,62.547 94.323,62.287 v2(94.361,62.25) ; v2(102.227,52.197) 106.121,52.197 109.225,49.093 J2.22@109.225,42.962
DCDC_SYNC: J2.42 U2.5 U4.5 | length 117.2
  Top Layer, Top w0.2: v2(67.361,122.047) 67.869,121.539 67.869,109.245 v2(67.386,108.763) ; v2(89.663,63.508) 91.7,61.471 v2(91.7,49.05)
  Bottom Layer, Bottom w0.2: U4.5@65.971,107.869 66.171,107.669 67.363,107.669 67.386,107.645 ; U2.5@65.971,122.225 66.149,122.047 v2(67.361,122.047) ; v2(67.386,108.763) 67.386,107.645 ; v2(89.663,63.508) 91.707,65.553 91.707,82.327 90.738,83.296 90.738,104.13 89.814,105.054 75.514,105.054 75.133,105.435 75.133,109.449 74.676,109.906 69.85,109.906 69.571,109.626 69.571,107.807 69.374,107.61 67.421,107.61 67.386,107.645 ; v2(91.7,49.05) 96.759,49.05 99.225,46.584 J2.42@99.225,42.962
E1A: C29.2 J2.39 J5.3 | length 214.8
  Top Layer, Top w0.3: v2(228.731,66.04) 228.759,66.011 228.832,66.011 229.395,65.449 245.433,65.449 J5.3@246.863,66.878
  Bottom Layer, Bottom w0.3: J2.39@100.725,42.962 100.725,23.43 109.48,14.675 210.293,14.675 215.35,19.732 215.35,50.832 228.206,63.688 228.206,65.515 v2(228.731,66.04) ; C29.2@246.837,70.96 C29.2@246.863,70.986 J5.3@246.863,66.878
E1B: C28.2 J2.40 J5.4 | length 217.7
  Top Layer, Top w0.3: v2(228.731,64.999) 248.006,64.999 248.863,65.856 J5.4@248.863,66.878
  Bottom Layer, Bottom w0.3: J2.40@100.225,42.962 100.225,23.244 109.244,14.225 210.479,14.225 215.8,19.546 215.8,50.646 228.731,63.576 v2(228.731,64.999) ; J5.4@248.863,66.878 248.863,70.954 C28.2@248.895,70.986 C28.2@248.901,70.979
E2A: C27.2 ENC1.3 J2.36 | length 285.4
  Bottom Layer, Bottom w0.3: J2.36@102.225,42.962 102.225,23.353 110.003,15.575 209.92,15.575 214.382,20.036 214.382,51.136 227.306,64.06 227.306,66.074 228.356,67.124 228.356,93.105 227.042,94.419 216.882,94.419 214.335,96.966 214.335,111.236 217.526,114.427 247.269,114.427 248.5,113.196 ENC1.3@248.5,111.73 ; ENC1.3@248.49,111.74 248.49,109.47 C27.2@248.575,109.385
E2B: C26.2 ENC1.5 J2.37 | length 280.8
  Bottom Layer, Bottom w0.3: J2.37@101.725,42.962 101.725,23.167 109.767,15.125 210.107,15.125 214.832,19.85 214.832,50.95 227.756,63.874 227.756,65.887 228.806,66.937 228.806,93.292 227.228,94.869 217.068,94.869 214.785,97.152 214.785,111.05 217.712,113.977 242.487,113.977 243.42,113.044 ENC1.5@243.42,111.73 243.42,109.391 C26.2@243.408,109.38
ENC2_SW: ENC1.2 R29.1 | length 140.2
  Bottom Layer, Bottom w0.3: R29.1@179.05,11.875 179.55,12.375 211.175,12.375 217.6,18.8 217.6,49.9 230.606,62.906 230.606,72.846 231.877,74.117 245.135,74.117 245.825,74.807 245.825,79.709 248.49,82.374 ENC1.2@248.49,97.015